# Altium PCB layout.PcbDoc
Units mil, origin at the board's own origin, x right, y up, seen from the top; angles counter-clockwise.
Board outline 3909.97 x 2529.06 mil, 2 copper layers (Top Layer, Bottom Layer); 35 components, 47 nets, 127 pads, 45 vias.
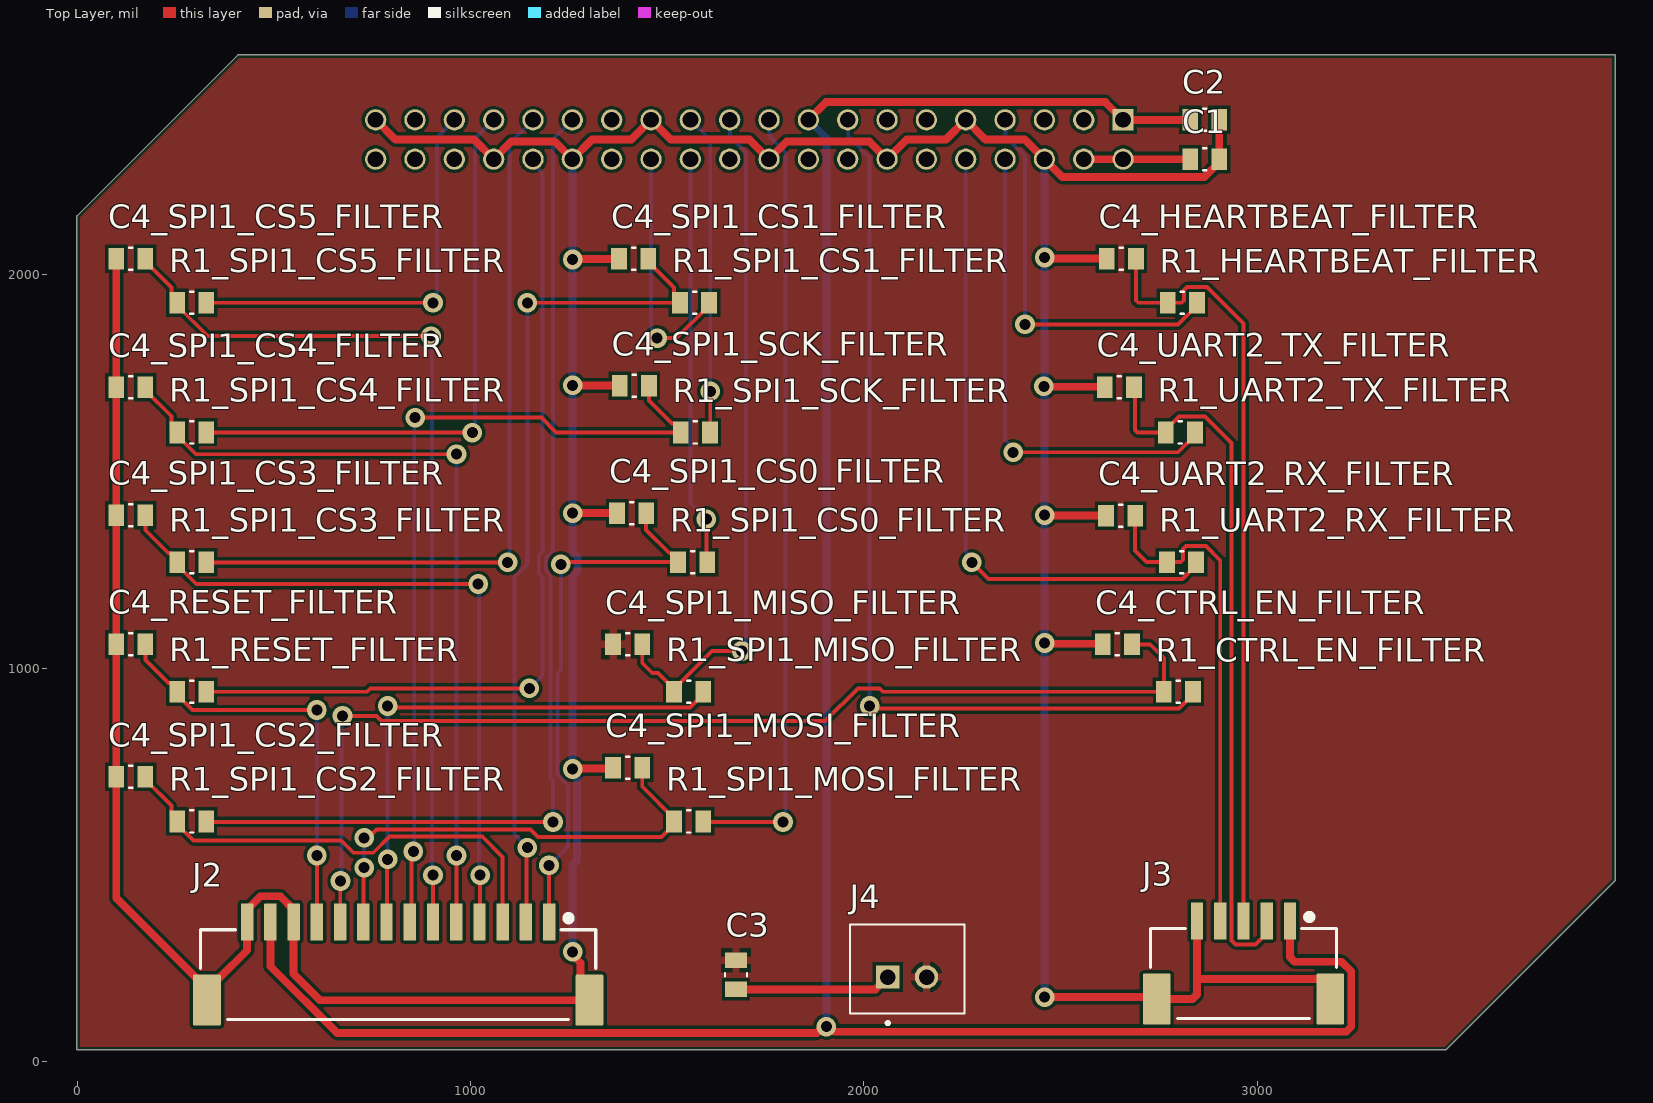
[diagram p0: Top Layer view]
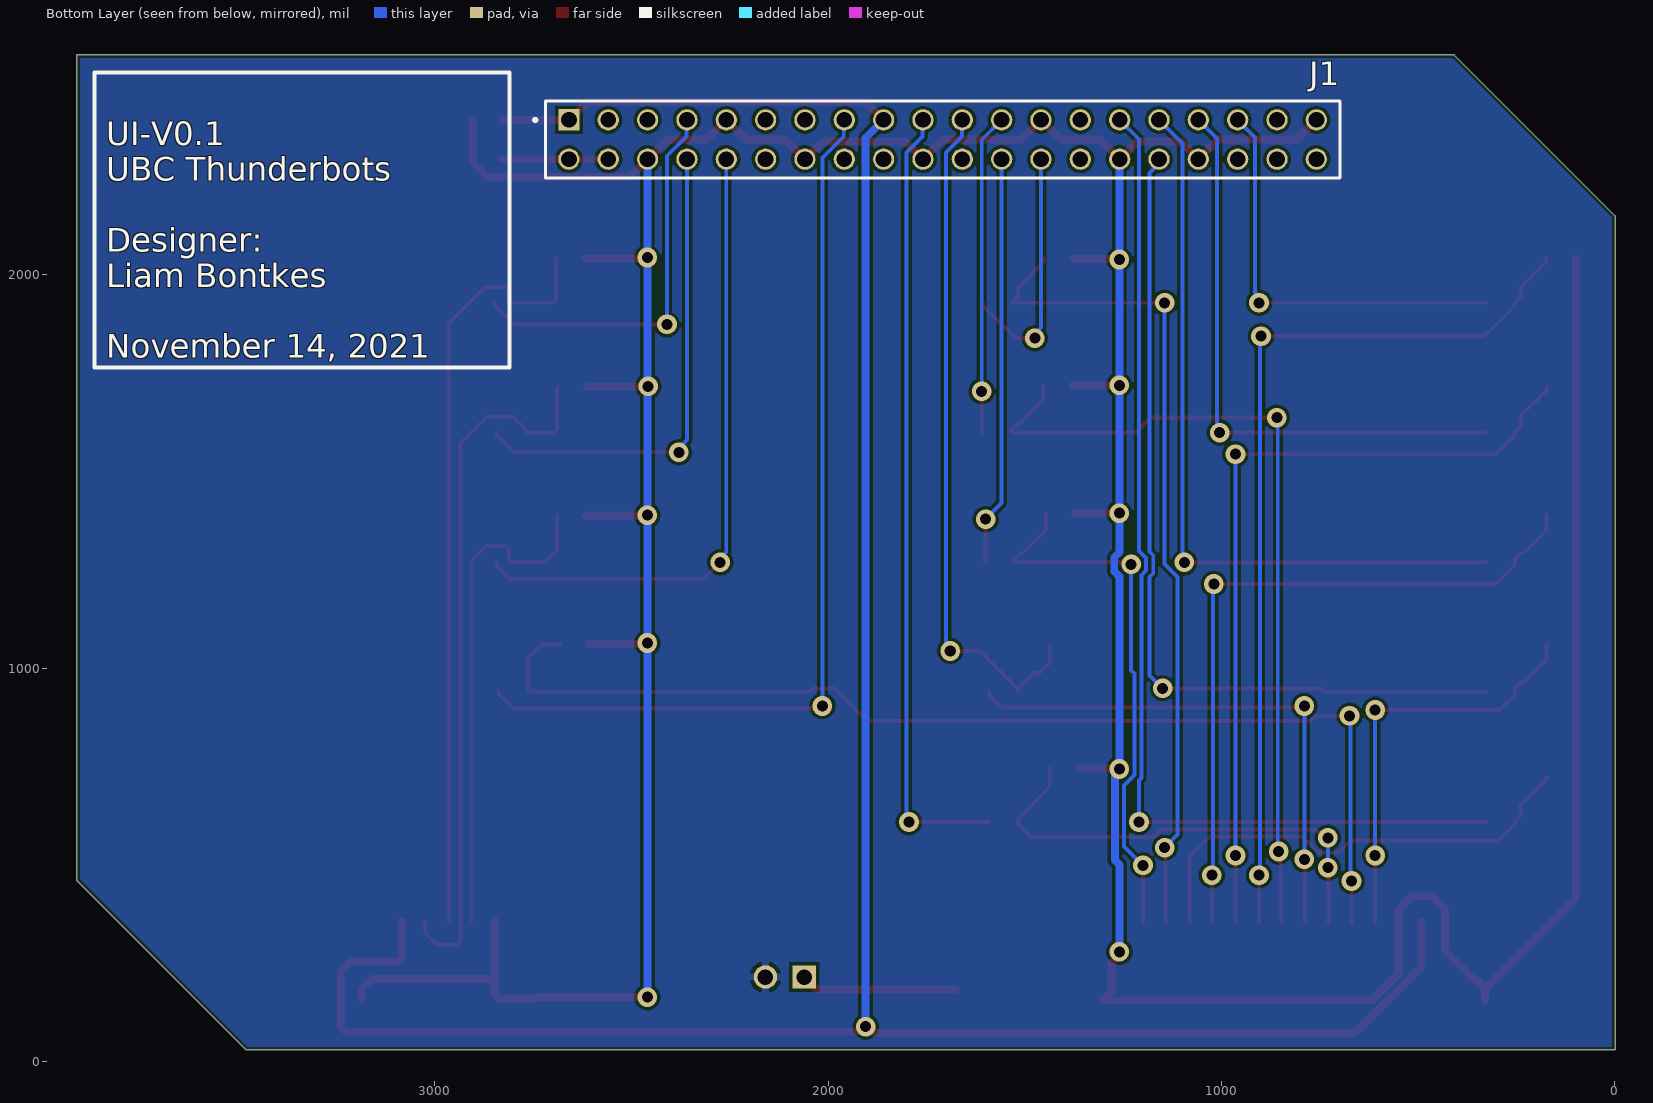
[diagram p1: Bottom Layer view, seen from below]

## Layer stack, top to bottom
Top Solder: solder mask 0.4, Solder Resist, Dk 3.5
Top Layer: signal copper 1.4
Dielectric 1: dielectric 12.6, FR-4, Dk 4.8
Bottom Layer: signal copper 1.4
Bottom Solder: solder mask 0.4, Solder Resist, Dk 3.5

## Board outline
-0.28,30 3480,30 3909.68,459.68 3909.68,2559.06 409.05,2559.06 -0.28,2149.72

## Design rules (kind name [scope] priority, off if disabled: settings)
BoardOutlineClearance [All] p1: gap=7.87 ignorepadtopadclearanceinfootprint=FALSE except(15.75: Arc-SplitBarrior Arc-SplitContinuation Track-SplitBarrior Track-SplitContinuation SMDPad-SplitBarrior SMDPad-SplitContinuation THPad-SplitBarrior THPad-SplitContinuation Via-SplitBarrior Via-SplitContinuation Fill-SplitBarrior Fill-SplitContinuation Poly-SplitBarrior Poly-SplitContinuation Region-SplitBarrior Region-SplitContinuation Text-SplitBarrior Text-SplitContinuation)
Clearance "Clearance Bottom Layer" [OnLayer('Bottom Layer')] p1: gap=8 ignorepadtopadclearanceinfootprint=TRUE except(10: Arc-Text Track-Text SMDPad-Text THPad-Text Via-Text Fill-Text Poly-Text Region-Text Text-Text)
Clearance "Clearance Top Layer" [OnLayer('Top Layer')] p2: gap=8 ignorepadtopadclearanceinfootprint=TRUE except(10: Arc-Text Track-Text SMDPad-Text THPad-Text Via-Text Fill-Text Poly-Text Region-Text Text-Text)
Clearance [All] p3: gap=7.87 ignorepadtopadclearanceinfootprint=TRUE except(3.5: Arc-Arc Arc-Track Arc-SMDPad Track-Track Track-SMDPad SMDPad-SMDPad; 5: Arc-Via Track-Via SMDPad-Via THPad-Via Via-Via; 10: Arc-Text Track-Text SMDPad-Text THPad-Text Via-Text Fill-Text Poly-Text Region-Text Text-Text)
HoleSize [All] p1: absolutevalues=TRUE maxlimit=248.03 minlimit=7.87 maxpercent=80.000 minpercent=20.000
MinimumAnnularRing [All] p1: minimumring=3
MinimumSolderMaskSliver [All] p1: minsoldermaskwidth=3.94
PolygonConnect PolygonConnect_1 [All] p1: thpad.connectstyle=Relief thpad.reliefconductorwidth=20 thpad.reliefentries=4 thpad.polygonreliefangle="90 Angle" thpad.airgapwidth=10 smdpad.connectstyle=Relief smdpad.reliefconductorwidth=20 smdpad.reliefentries=4 smdpad.polygonreliefangle="90 Angle" smdpad.airgapwidth=10 via.connectstyle=Direct via.reliefconductorwidth=20 via.reliefentries=4 via.polygonreliefangle="90 Angle" via.airgapwidth=10
RoomDefinition UART2_TX_FILTER [InComponentClass('UART2_TX_FILTER')] p1: confinementstyle=ConfineIn formatcopy=TRUE lockcomponents=FALSE outline 2569.68,1549.06 2884.68,1549.06 2884.68,1764.06 2569.68,1764.06
RoomDefinition UART2_RX_FILTER [InComponentClass('UART2_RX_FILTER')] p2: confinementstyle=ConfineIn formatcopy=TRUE lockcomponents=FALSE outline 2574.68,1219.06 2889.68,1219.06 2889.68,1439.06 2574.68,1439.06
RoomDefinition U_power [InComponentClass('U_power')] p3: confinementstyle=ConfineIn formatcopy=TRUE lockcomponents=FALSE outline 1624.68,69.06 3244.68,69.06 3244.68,429.06 1624.68,429.06
RoomDefinition U_motordriver [InComponentClass('U_motordriver')] p4: confinementstyle=ConfineIn formatcopy=TRUE lockcomponents=FALSE outline 272.76,69.41 272.76,424.06 1359.68,424.06 1359.68,69.41
RoomDefinition U_jetson-nano [InComponentClass('U_jetson-nano')] p5: confinementstyle=ConfineIn formatcopy=TRUE lockcomponents=FALSE outline 674.68,2224.06 2944.68,2224.06 2944.68,2464.06 674.68,2464.06
RoomDefinition SPI1_SCK_FILTER [InComponentClass('SPI1_SCK_FILTER')] p6: confinementstyle=ConfineIn formatcopy=TRUE lockcomponents=FALSE outline 1339.68,1549.06 1649.68,1549.06 1649.68,1769.06 1339.68,1769.06
RoomDefinition SPI1_MOSI_FILTER [InComponentClass('SPI1_MOSI_FILTER')] p7: confinementstyle=ConfineIn formatcopy=TRUE lockcomponents=FALSE outline 1319.68,564.06 1634.68,564.06 1634.68,799.06 1319.68,799.06
RoomDefinition SPI1_MISO_FILTER [InComponentClass('SPI1_MISO_FILTER')] p8: confinementstyle=ConfineIn formatcopy=TRUE lockcomponents=FALSE outline 1319.68,894.06 1634.68,894.06 1634.68,1109.06 1319.68,1109.06
RoomDefinition SPI1_CS5_FILTER [InComponentClass('SPI1_CS5_FILTER')] p9: confinementstyle=ConfineIn formatcopy=TRUE lockcomponents=FALSE outline 59.68,1879.06 369.68,1879.06 369.68,2089.06 59.68,2089.06
RoomDefinition SPI1_CS4_FILTER [InComponentClass('SPI1_CS4_FILTER')] p10: confinementstyle=ConfineIn formatcopy=TRUE lockcomponents=FALSE outline 59.68,1549.06 369.68,1549.06 369.68,1764.06 59.68,1764.06
RoomDefinition SPI1_CS3_FILTER [InComponentClass('SPI1_CS3_FILTER')] p11: confinementstyle=ConfineIn formatcopy=TRUE lockcomponents=FALSE outline 59.68,1219.06 369.68,1219.06 369.68,1439.06 59.68,1439.06
RoomDefinition SPI1_CS2_FILTER [InComponentClass('SPI1_CS2_FILTER')] p12: confinementstyle=ConfineIn formatcopy=TRUE lockcomponents=FALSE outline 59.68,564.06 369.68,564.06 369.68,774.06 59.68,774.06
RoomDefinition SPI1_CS1_FILTER [InComponentClass('SPI1_CS1_FILTER')] p13: confinementstyle=ConfineIn formatcopy=TRUE lockcomponents=FALSE outline 1334.68,1879.06 1649.68,1879.06 1649.68,2089.06 1334.68,2089.06
RoomDefinition SPI1_CS0_FILTER [InComponentClass('SPI1_CS0_FILTER')] p14: confinementstyle=ConfineIn formatcopy=TRUE lockcomponents=FALSE outline 1329.68,1219.06 1644.68,1219.06 1644.68,1444.06 1329.68,1444.06
RoomDefinition RESET_FILTER [InComponentClass('RESET_FILTER')] p15: confinementstyle=ConfineIn formatcopy=TRUE lockcomponents=FALSE outline 59.68,894.06 369.68,894.06 369.68,1109.06 59.68,1109.06
RoomDefinition HEARTBEAT_FILTER [InComponentClass('HEARTBEAT_FILTER')] p16: confinementstyle=ConfineIn formatcopy=TRUE lockcomponents=FALSE outline 2574.68,1879.06 2889.68,1879.06 2889.68,2089.06 2574.68,2089.06
RoomDefinition CTRL_EN_FILTER [InComponentClass('CTRL_EN_FILTER')] p17: confinementstyle=ConfineIn formatcopy=TRUE lockcomponents=FALSE outline 2564.68,894.06 2879.68,894.06 2879.68,1109.06 2564.68,1109.06
RoutingCorners [All] p1: cornerstyle=Round minsetback=100 maxsetback=100
RoutingVias [All] p1: holewidth=19.68 width=39.37 viastyle="Through Hole" minholewidth=7.87 minwidth=17.72 maxholewidth=39.37 maxwidth=78.74
SilkToSilkClearance [All] p1: silktosilkclearance=3.94
SilkToSolderMaskClearance [IsPad] p1: minsilkscreentomaskgap=3.94 clearancetoexposedcopper=TRUE
SolderMaskExpansion [All] p1: expansion=4 istentingtop=FALSE
Width [All] p1: maxlimit=100 minlimit=3.5 preferedwidth=15
25 further rules are at their usual default settings.

## Classes and differential pairs
channel class low-pass-filter: CTRL_EN_FILTER HEARTBEAT_FILTER RESET_FILTER SPI1_CS0_FILTER SPI1_CS1_FILTER SPI1_CS2_FILTER SPI1_CS3_FILTER SPI1_CS4_FILTER SPI1_CS5_FILTER SPI1_MISO_FILTER SPI1_MOSI_FILTER SPI1_SCK_FILTER UART2_RX_FILTER UART2_TX_FILTER
component class U_power: C3 J3 J4
component class U_motordriver: J2
component class SPI1_MISO_FILTER: C4_SPI1_MISO_FILTER R1_SPI1_MISO_FILTER
component class HEARTBEAT_FILTER: C4_HEARTBEAT_FILTER R1_HEARTBEAT_FILTER
component class UART2_RX_FILTER: C4_UART2_RX_FILTER R1_UART2_RX_FILTER
component class UART2_TX_FILTER: C4_UART2_TX_FILTER R1_UART2_TX_FILTER
component class RESET_FILTER: C4_RESET_FILTER R1_RESET_FILTER
component class CTRL_EN_FILTER: C4_CTRL_EN_FILTER R1_CTRL_EN_FILTER
component class SPI1_CS5_FILTER: C4_SPI1_CS5_FILTER R1_SPI1_CS5_FILTER
component class SPI1_CS4_FILTER: C4_SPI1_CS4_FILTER R1_SPI1_CS4_FILTER
component class SPI1_CS3_FILTER: C4_SPI1_CS3_FILTER R1_SPI1_CS3_FILTER
component class SPI1_CS2_FILTER: C4_SPI1_CS2_FILTER R1_SPI1_CS2_FILTER
component class SPI1_CS1_FILTER: C4_SPI1_CS1_FILTER R1_SPI1_CS1_FILTER
component class SPI1_CS0_FILTER: C4_SPI1_CS0_FILTER R1_SPI1_CS0_FILTER
component class SPI1_MOSI_FILTER: C4_SPI1_MOSI_FILTER R1_SPI1_MOSI_FILTER
component class SPI1_SCK_FILTER: C4_SPI1_SCK_FILTER R1_SPI1_SCK_FILTER
component class U_jetson-nano: C1 C2 J1

## Components (designator, comment, footprint, x,y, rotation, side; value= is the part's Value field where it differs from the comment)
C1 "0.1uF 25V" 0805 2866.68,2294.06 r180 top value=0.1uF
C2 "0.1uF 25V" 0805 2866.68,2394.06 r180 top value=0.1uF
C3 "0.1uF 25V" 0805 1675.15,220.77 r270 top value=0.1uF
C4_CTRL_EN_FILTER "100pF 16V" 0805 2644.68,1060.59 r0 top value=100pF (schematic designator C4)
C4_HEARTBEAT_FILTER "100pF 16V" 0805 2654.68,2041.36 r0 top value=100pF (schematic designator C4)
C4_RESET_FILTER "100pF 16V" 0805 136.68,1060.59 r0 top value=100pF (schematic designator C4)
C4_SPI1_CS0_FILTER "100pF 16V" 0805 1409.68,1394.19 r0 top value=100pF (schematic designator C4)
C4_SPI1_CS1_FILTER "100pF 16V" 0805 1414.68,2041.36 r0 top value=100pF (schematic designator C4)
C4_SPI1_CS2_FILTER "100pF 16V" 0805 136.68,724.06 r0 top value=100pF (schematic designator C4)
C4_SPI1_CS3_FILTER "100pF 16V" 0805 136.68,1389.06 r0 top value=100pF (schematic designator C4)
C4_SPI1_CS4_FILTER "100pF 16V" 0805 136.68,1714.06 r0 top value=100pF (schematic designator C4)
C4_SPI1_CS5_FILTER "100pF 16V" 0805 136.68,2041.36 r0 top value=100pF (schematic designator C4)
C4_SPI1_MISO_FILTER "100pF 16V" 0805 1399.68,1060.59 r0 top value=100pF (schematic designator C4)
C4_SPI1_MOSI_FILTER "100pF 16V" 0805 1399.68,747.02 r0 top value=100pF (schematic designator C4)
C4_SPI1_SCK_FILTER "100pF 16V" 0805 1416.68,1717.78 r0 top value=100pF (schematic designator C4)
C4_UART2_RX_FILTER "100pF 16V" 0805 2652.68,1387.52 r0 top value=100pF (schematic designator C4)
C4_UART2_TX_FILTER "100pF 16V" 0805 2649.68,1714.44 r0 top value=100pF (schematic designator C4)
J1 "CN HDR 40POS" "CN HDR 40POS 0.1 TH" 1709.05,2344.06 r0 bottom
J2 "CN HDR 14POS" "CN HDR 14POS SMD 1.5MM" 816.22,246.73 r0 top
J3 "CN HDR 5POS" "CN HDR 5POS SMD 1.5MM" 2965.15,249.6 r0 top
J4 "CN HDR 2POS JST XH" JST_B2B-XH-A(LF)(SN) 2110.15,235.76 r0 top
R1_CTRL_EN_FILTER "160" 0805 2799.68,940.21 r0 top value=1 (schematic designator R1)
R1_HEARTBEAT_FILTER "160" 0805 2809.68,1929.06 r0 top value=1 (schematic designator R1)
R1_RESET_FILTER "160" 0805 291.68,940.21 r0 top value=1 (schematic designator R1)
R1_SPI1_CS0_FILTER "160" 0805 1564.68,1269.82 r0 top value=1 (schematic designator R1)
R1_SPI1_CS1_FILTER "160" 0805 1569.68,1929.06 r0 top value=1 (schematic designator R1)
R1_SPI1_CS2_FILTER "160" 0805 291.68,610.59 r0 top value=1 (schematic designator R1)
R1_SPI1_CS3_FILTER "160" 0805 291.68,1269.82 r0 top value=1 (schematic designator R1)
R1_SPI1_CS4_FILTER "160" 0805 291.68,1599.44 r0 top value=1 (schematic designator R1)
R1_SPI1_CS5_FILTER "160" 0805 291.68,1929.06 r0 top value=1 (schematic designator R1)
R1_SPI1_MISO_FILTER "160" 0805 1554.68,940.21 r0 top value=1 (schematic designator R1)
R1_SPI1_MOSI_FILTER "160" 0805 1554.68,610.59 r0 top value=1 (schematic designator R1)
R1_SPI1_SCK_FILTER "160" 0805 1571.68,1599.44 r0 top value=1 (schematic designator R1)
R1_UART2_RX_FILTER "160" 0805 2807.68,1269.82 r0 top value=1 (schematic designator R1)
R1_UART2_TX_FILTER "160" 0805 2804.68,1599.44 r0 top value=1 (schematic designator R1)

## Footprints (in the part's own frame and the unit in brackets; to place one, negate y for a bottom-side part, rotate by r counter-clockwise, add the part's x,y. Pads: shape width x height; smd on the part's side, far side on the other; paste and mask are expansions set on the pad)
0805 [mil]
  rect 40x55 smd: 1(-37,0) 2(37,0)
  silkscreen extent -4,-28 4,28, body extent -47,-28 47,28, height 24
"CN HDR 5POS SMD 1.5MM" [mm] "Connector Header Surface Mount 5 position 0.059\" (1.50mm)"
  rrect10% 1.8x3.3 smd: 0(-5.6,-2.3) 0(5.6,-2.3)
  rrect10% 0.8x2.4 smd: 1(3,2.75) 2(1.5,2.75) 3(0,2.75) 4(-1.5,2.75) 5(-3,2.75)
  silkscreen extent -6,-3.55 6,3, body extent -6,-2.9 6,4.1, height 7.51
"CN HDR 14POS SMD 1.5MM" [mm] "Connector Header Surface Mount 14 position 0.059\" (1.50mm)"
  rrect10% 1.8x3.3 smd: 0(-12.35,-2.3) 0(12.35,-2.3)
  rrect10% 0.8x2.4 smd: 1(9.75,2.75) 2(8.25,2.75) 3(6.75,2.75) 4(5.25,2.75) 5(3.75,2.75) 6(2.25,2.75) 7(0.75,2.75) 8(-0.75,2.75) 9(-2.25,2.75) 10(-3.75,2.75) 11(-5.25,2.75) 12(-6.75,2.75) 13(-8.25,2.75) 14(-9.75,2.75)
  silkscreen extent -12.75,-3.55 12.76,3
"CN HDR 40POS 0.1 TH" [mm] "40 Position Header Connector 0.100\" (2.54mm) Through Hole"
  rect 1.37x1.37 hole 1.02: 01(24.13,-1.27)
  round 1.37 hole 1.02: 02(24.13,1.27) 03(21.59,-1.27) 04(21.59,1.27) 05(19.05,-1.27) 06(19.05,1.27) 07(16.51,-1.27) 08(16.51,1.27) 09(13.97,-1.27) 10(13.97,1.27) 11(11.43,-1.27) 12(11.43,1.27) 13(8.89,-1.27) 14(8.89,1.27) 15(6.35,-1.27) 16(6.35,1.27) 17(3.81,-1.27) 18(3.81,1.27) 19(1.27,-1.27) 20(1.27,1.27) 21(-1.27,-1.27) 22(-1.27,1.27) 23(-3.81,-1.27) 24(-3.81,1.27) 25(-6.35,-1.27) 26(-6.35,1.27) 27(-8.89,-1.27) 28(-8.89,1.27) 29(-11.43,-1.27) 30(-11.43,1.27) 31(-13.97,-1.27) 32(-13.97,1.27) 33(-16.51,-1.27) 34(-16.51,1.27) 35(-19.05,-1.27) 36(-19.05,1.27) 37(-21.59,-1.27) 38(-21.59,1.27) 39(-24.13,-1.27) 40(-24.13,1.27)
  silkscreen extent -25.66,-2.47 26.4,2.47
JST_B2B-XH-A(LF)(SN) [mm]
  rect 1.508x1.508 hole 1: 1(-1.25,-0.525)
  round 1.508 hole 1: 2(1.25,-0.525)
  silkscreen extent -3.7,-3.6 3.7,2.88, body extent -3.7,-2.85 3.7,2.9, height 7.1

## Part data
C1 C2 C3: library part "CAP 0.1uF 25V", "Default Symbol for Capacitors", Operating Temperature="-55°C ~ 125°C", Rating=25V, Temperature Coefficient=X7R, Tolerance=10%, Part Number="CAP 0.1uF 25V"
C4_CTRL_EN_FILTER C4_HEARTBEAT_FILTER C4_RESET_FILTER C4_SPI1_CS0_FILTER C4_SPI1_CS1_FILTER C4_SPI1_CS2_FILTER C4_SPI1_CS3_FILTER C4_SPI1_CS4_FILTER C4_SPI1_CS5_FILTER C4_SPI1_MISO_FILTER C4_SPI1_MOSI_FILTER C4_SPI1_SCK_FILTER C4_UART2_RX_FILTER C4_UART2_TX_FILTER: library part "CAP 100pF 16V", "Default Symbol for Capacitors", Operating Temperature="-55°C ~ 125°C", Rating=16V, Temperature Coefficient=X5R, Tolerance=10%, Part Number="CAP 100pF 16V"
J1: "40 Position Header Connector", Supplier Part Number 1=S6104-ND, Part Number="CN HDR 40POS", Pin Count=40, Supplier 1=Digi-Key, Supplier URL 1=https://www.digikey.ca/en/products/detail/sullins-connector-solutions/PPTC202LFBN-RC/807240?s=N4IgTCBcDaIMoDYCMAGALAWgHIBEQF0BfIA
J2: "Connector Header 14 Position", Supplier Part Number 1=455-4210-1-ND, Part Number="CN HDR 14POS", Pin Count=14, Supplier 1=Digi-Key, Supplier URL 1=https://www.digikey.ca/en/products/detail/jst-sales-america-inc/BM14B-ZESS-TBT-LF-SN/1886998?s=N4IgTCBcDaICwFYEFo5gIwAZnuQOQBEQBdAXyA
J3: "Connector Header 5 Position", Supplier Part Number 1=455-2383-1-ND, Part Number="CN HDR 5POS", Pin Count=5, Supplier 1=Digi-Key, Supplier URL 1=https://www.digikey.ca/en/products/detail/jst-sales-america-inc/BM05B-ZESS-TBT-LF-SN/1886989?s=N4IgTCBcDaICwFYEFowGYAcbkEZkDkAREAXQF8g
J4: "Connector Header Through Hole 2 position 0.098 _2.50mm_ / JST XH", Package=None, MF="JST Sales", MP=B2B-XH-A_LF__SN_, Part Number="CN HDR 2POS JST XH", Pin Count=2, Price=None, SnapEDA_Link=https://www.snapeda.com/parts/B2B-XH-A%28LF%29%28SN%29/JST%20Sales%20America%20Inc./view-part/492310/?ref=snap
R1_CTRL_EN_FILTER R1_HEARTBEAT_FILTER R1_RESET_FILTER R1_SPI1_CS0_FILTER R1_SPI1_CS1_FILTER R1_SPI1_CS2_FILTER R1_SPI1_CS3_FILTER R1_SPI1_CS4_FILTER R1_SPI1_CS5_FILTER R1_SPI1_MISO_FILTER R1_SPI1_MOSI_FILTER R1_SPI1_SCK_FILTER R1_UART2_RX_FILTER R1_UART2_TX_FILTER: library part "RES 160.0 1/8W", "Default Resistor Symbol", Package=0805, Power (Watts)=0.125W, Tolerance=5%, Part Number="RES 160.0 1/8W"

## Via types
v1: diameter 50, hole 28, Top Layer to Bottom Layer, 45 vias

## Nets (pads, with @x,y where several pads share a name; then routed paths per layer and width w, separated by ;. In a path a pad name is that pad's centre, name@x,y a point inside that pad or via, vN(x,y) a via of type N, cw(c..) or ccw(c..) an arc to the next point about the centre after c; other vN are vias at no path point)
CTRL_EN: J1.15 R1_CTRL_EN_FILTER.2 | length 2359.7
  Top Layer w10: v1(2014.68,904.06) 2021.03,897.71 2801.68,897.71 2836.68,932.71 R1_CTRL_EN_FILTER.2
  Bottom Layer w10: J1.15 1960.37,2392.73 1960.37,2352.09 2014.68,2297.77 v1(2014.68,904.06)
CTRL_EN_FILTER: C4_CTRL_EN_FILTER.2 J2.10 R1_CTRL_EN_FILTER.1 | length 2839.2
  Top Layer w10: J2.10 669.13,355.55 669.13,458.5 v1(669.68,459.06) ; v1(674.68,879.06) 760.94,879.06 773.94,866.06 1901.68,866.06 1984.68,949.06 2039.68,949.06 2048.53,940.21 R1_CTRL_EN_FILTER.1 2762.68,1026.06 2728.15,1060.59 C4_CTRL_EN_FILTER.2
  Bottom Layer w10: v1(669.68,459.06) 672.18,461.56 672.18,876.56 v1(674.68,879.06)
HEARTBEAT: J1.07 R1_HEARTBEAT_FILTER.2 | length 1005.2
  Top Layer w10: v1(2409.68,1874.06) 2799.18,1874.06 2846.68,1921.56 R1_HEARTBEAT_FILTER.2
  Bottom Layer w10: J1.07 2360.37,2392.73 2360.37,2352.09 2409.68,2302.77 v1(2409.68,1874.06)
HEARTBEAT_FILTER: C4_HEARTBEAT_FILTER.2 J3.3 R1_HEARTBEAT_FILTER.1 | length 1972
  Top Layer w10: C4_HEARTBEAT_FILTER.2 2691.68,1934.91 2697.54,1929.06 2807.68,1929.06 2813.68,1935.06 2813.68,1961.94 2821.3,1969.56 2872.07,1969.56 2965.16,1876.47 J3.3
I2C_1_SCL: J1.28
I2C_1_SDA: J1.27
I2C_2_SCL: J1.05
I2C_2_SDA: J1.03
I2S_4_SCLK: J1.12
I2S_4_SDIN: J1.38
I2S_4_SDOUT: J1.40
JETSON_3V3: C2.2 J1.01 J1.17 J2.13 J3.1 | length 6682.7
  Top Layer w20: J2.13 491.42,242.72 660.92,73.22 1880.73,73.22 1896.57,89.06 v1(1904.68,89.06) 1912.8,89.06 1925.76,76.09 3226.44,76.09 3239.06,88.71 3239.06,229.4 3214.4,254.06 3094.98,254.06 3083.27,265.77 J3.1 ; J1.17 1904.02,2439.02 2614.08,2439.02 J1.01 C2.2
  Bottom Layer w20: J1.17 1904.68,2348.42 v1(1904.68,89.06)
JETSON_5V: C1.2 J1.02 J1.04 | length 270.6
  Top Layer w20: J1.04 J1.02 C1.2
JETSON_GND: C1.1 C2.1 C4_CTRL_EN_FILTER.1 C4_HEARTBEAT_FILTER.1 C4_RESET_FILTER.1 C4_SPI1_CS0_FILTER.1 C4_SPI1_CS1_FILTER.1 C4_SPI1_CS2_FILTER.1 C4_SPI1_CS3_FILTER.1 C4_SPI1_CS4_FILTER.1 C4_SPI1_CS5_FILTER.1 C4_SPI1_MOSI_FILTER.1 C4_SPI1_SCK_FILTER.1 C4_UART2_RX_FILTER.1 C4_UART2_TX_FILTER.1 J1.06 J1.09 J1.14 J1.20 J1.25 J1.30 J1.34 J1.39 J2.0 J2.12 J2.14 J3.0 J3.5 | length 12224.4
  Top Layer w20: C4_SPI1_CS5_FILTER.1 C4_SPI1_CS4_FILTER.1 C4_SPI1_CS3_FILTER.1 C4_RESET_FILTER.1 C4_SPI1_CS2_FILTER.1 99.68,416.02 J2.0@330,185.71 ; J2.0@330,156.18 J2.0@330,185.71 ; J1.39 809.05,2344.05 1009.05,2344.05 J1.34 1104.02,2339.02 1214.08,2339.02 J1.30 1309.05,2344.06 1409.05,2344.06 J1.25 1509.05,2344.05 1709.05,2344.05 J1.20 1804.02,2339.02 2014.08,2339.02 J1.14 2109.05,2344.06 2209.05,2344.06 J1.09 2309.05,2344.05 2409.05,2344.05 J1.06 2504.55,2248.56 2865.68,2248.56 2903.68,2286.56 C1.1 C2.1 ; v1(1259.68,279.06) 1259.68,270.94 1279.48,251.14 1279.48,179.14 1302.44,156.18 617.56,156.18 550.47,223.27 J2.12 550.47,386.5 516.72,420.24 466.11,420.24 432.36,386.5 432.36,283.48 360.02,211.14 355.43,211.14 J2.0@330,185.71 ; v1(1259.68,744.06) 1261.17,745.54 1361.2,745.54 C4_SPI1_MOSI_FILTER.1 ; v1(1259.68,1394.06) 1259.82,1394.19 C4_SPI1_CS0_FILTER.1 ; v1(1259.68,1719.06) 1260.32,1718.42 1379.05,1718.42 C4_SPI1_SCK_FILTER.1 ; v1(1259.68,2039.06) 1260.84,2040.21 1376.53,2040.21 C4_SPI1_CS1_FILTER.1 ; v1(2457.7,1716.64) 2458.8,1715.54 2611.58,1715.54 C4_UART2_TX_FILTER.1 ; v1(2459.68,164.06) 2739.68,164.06 2744.68,159.06 2835.33,159.06 2847.05,170.77 2847.05,210.47 ; v1(2459.68,1064.06) 2461.42,1062.32 2605.95,1062.32 C4_CTRL_EN_FILTER.1 ; v1(2459.68,1389.06) 2460.45,1388.29 2614.92,1388.29 C4_UART2_RX_FILTER.1 ; v1(2459.68,2044.06) 2462.38,2041.36 C4_HEARTBEAT_FILTER.1 ; J3.5 2847.05,210.47 ; J3.0@3185.63,159.06 3185.63,185.04 3160.2,210.47 2847.05,210.47
  Bottom Layer w20: J1.30 1259.37,2293.74 1259.37,2039.06 1259.37,1719.06 1259.37,1394.06 1259.37,1295.19 1272.68,1281.87 1272.68,1246.24 1259.37,1232.93 1259.37,736.26 1270.68,724.94 1270.68,511.56 1259.68,500.56 v1(1259.68,279.06) ; J1.06 2459.05,164.69 v1(2459.68,164.06)
NetJ2_8: J2.8 R1_SPI1_MISO_FILTER.2 | length 1375.3
  Top Layer w10: J2.8 788.19,356.5 788.19,512.56 v1(789.68,514.06) ; v1(789.68,904.06) 794.03,899.71 1558.68,899.71 1591.68,932.71 R1_SPI1_MISO_FILTER.2
  Bottom Layer w10: v1(789.68,514.06) v1(789.68,904.06)
POWER_5V: C3.2 J4.1 | length 398.8
  Top Layer w20: C3.2 2029.62,183.77 J4.1
POWER_GND: C3.1 C4_SPI1_MISO_FILTER.1 J4.2
RESET: J1.32 R1_RESET_FILTER.2 | length 2200.6
  Top Layer w10: R1_RESET_FILTER.2 736.52,940.21 745.37,949.06 v1(1149.68,949.06)
  Bottom Layer w10: v1(1149.68,949.06) 1182.68,982.06 1182.68,1231.86 1173.68,1240.86 1173.68,1287.25 1182.68,1296.25 1182.68,2258.53 1159.05,2282.17 J1.32
RESET_FILTER: C4_RESET_FILTER.2 J2.11 R1_RESET_FILTER.1 | length 1076
  Top Layer w10: C4_RESET_FILTER.2 173.68,1021.21 232.18,962.71 239.68,962.71 254.68,947.71 R1_RESET_FILTER.1 254.68,932.71 293.34,894.06 v1(609.68,894.06) ; J2.11 609.61,355.08 609.61,523.98 v1(609.68,524.06)
  Bottom Layer w10: v1(609.68,524.06) v1(609.68,894.06)
SPI_1_CS0: J1.24 R1_SPI1_CS0_FILTER.2 | length 1041.9
  Top Layer w10: v1(1599.68,1379.06) 1599.68,1271.82 R1_SPI1_CS0_FILTER.2
  Bottom Layer w10: J1.24 1559.05,1419.69 v1(1599.68,1379.06)
SPI_1_CS0_FILTER: C4_SPI1_CS0_FILTER.2 J2.1 R1_SPI1_CS0_FILTER.1 | length 1405.4
  Top Layer w10: v1(1199.68,499.06) 1199.88,498.86 1199.88,355.2 J2.1 ; v1(1229.68,1264.06) 1235.45,1269.82 R1_SPI1_CS0_FILTER.1 1527.68,1277.32 1512.68,1292.32 1506.05,1292.32 1446.68,1351.69 C4_SPI1_CS0_FILTER.2
  Bottom Layer w10: v1(1199.68,499.06) 1247.68,547.06 1247.68,702.32 1221.68,728.32 1221.68,986.77 1229.68,994.77 v1(1229.68,1264.06)
SPI_1_CS1: J1.26 R1_SPI1_CS1_FILTER.2 | length 635.2
  Top Layer w10: v1(1474.68,1839.06) 1524.18,1839.06 1606.68,1921.56 R1_SPI1_CS1_FILTER.2
  Bottom Layer w10: J1.26 1459.05,1865.52 1474.68,1849.88 v1(1474.68,1839.06)
SPI_1_CS1_FILTER: C4_SPI1_CS1_FILTER.2 J2.2 R1_SPI1_CS1_FILTER.1 | length 2136.8
  Top Layer w10: J2.2 1142.85,356.83 1142.85,542.22 v1(1144.68,544.06) ; v1(1144.68,1929.06) R1_SPI1_CS1_FILTER.1 1517.68,1944.06 1517.68,1967.86 1451.68,2033.86 C4_SPI1_CS1_FILTER.2
  Bottom Layer w10: v1(1144.68,544.06) 1111.68,577.06 1111.68,1232.32 1144.68,1265.32 v1(1144.68,1929.06)
SPI_1_CS2: J1.29 R1_SPI1_CS2_FILTER.2 | length 2702
  Top Layer w10: R1_SPI1_CS2_FILTER.2 330.22,609.06 v1(1209.68,609.06)
  Bottom Layer w10: v1(1209.68,609.06) 1209.68,714.86 1203.68,720.86 1203.68,1236.32 1191.68,1248.32 1191.68,1279.8 1209.68,1297.8 1209.68,2344.69 J1.29
SPI_1_CS2_FILTER: C4_SPI1_CS2_FILTER.2 J2.3 R1_SPI1_CS2_FILTER.1 | length 1215.3
  Top Layer w10: C4_SPI1_CS2_FILTER.2 173.68,716.56 239.68,650.56 239.68,625.59 R1_SPI1_CS2_FILTER.1 254.68,603.09 295.72,562.06 671.69,562.06 702.69,531.06 752.94,531.06 793.94,572.06 1030.11,572.06 1081.97,520.2 J2.3
SPI_1_CS3: J1.31 R1_SPI1_CS3_FILTER.2 | length 1918
  Top Layer w10: R1_SPI1_CS3_FILTER.2 329.45,1269.06 v1(1094.68,1269.06)
  Bottom Layer w10: v1(1094.68,1269.06) 1099.02,1273.39 1099.02,2334.02 J1.31
SPI_1_CS3_FILTER: C4_SPI1_CS3_FILTER.2 J2.4 R1_SPI1_CS3_FILTER.1 | length 1811.5
  Top Layer w10: C4_SPI1_CS3_FILTER.2 173.68,1350.82 232.18,1292.32 239.68,1292.32 254.68,1277.32 R1_SPI1_CS3_FILTER.1 254.68,1262.32 302.95,1214.06 v1(1019.68,1214.06) ; J2.4 1023.8,355.89 1023.8,473.17 v1(1024.68,474.06)
  Bottom Layer w10: v1(1019.68,1214.06) 1022.18,1211.56 1022.18,476.56 v1(1024.68,474.06)
SPI_1_CS4: J1.33 R1_SPI1_CS4_FILTER.2 | length 1493.7
  Top Layer w10: R1_SPI1_CS4_FILTER.2 329.07,1599.06 v1(1004.68,1599.06)
  Bottom Layer w10: v1(1004.68,1599.06) 1011.49,1605.86 1011.49,2346.5 J1.33
SPI_1_CS4_FILTER: C4_SPI1_CS4_FILTER.2 J2.5 R1_SPI1_CS4_FILTER.1 | length 2074.9
  Top Layer w10: C4_SPI1_CS4_FILTER.2 173.68,1706.56 239.68,1640.56 239.68,1614.44 R1_SPI1_CS4_FILTER.1 254.68,1591.94 302.57,1544.06 v1(964.68,1544.06) ; J2.5 964.27,355.41 964.27,523.64 v1(964.68,524.06)
  Bottom Layer w10: v1(964.68,524.06) v1(964.68,1544.06)
SPI_1_CS5: J1.35 R1_SPI1_CS5_FILTER.2 | length 1063.5
  Top Layer w10: R1_SPI1_CS5_FILTER.2 v1(904.68,1929.06)
  Bottom Layer w10: v1(904.68,1929.06) 912.34,1936.71 912.34,1952.57 914.68,1954.91 914.68,2349.69 J1.35
SPI_1_CS5_FILTER: C4_SPI1_CS5_FILTER.2 J2.6 R1_SPI1_CS5_FILTER.1 | length 2321.6
  Top Layer w10: C4_SPI1_CS5_FILTER.2 173.68,2033.86 239.68,1967.86 239.68,1944.06 R1_SPI1_CS5_FILTER.1 254.68,1921.56 332.18,1844.06 v1(899.68,1844.06) ; v1(904.68,474.06) 904.74,474 904.74,355.06 J2.6
  Bottom Layer w10: v1(899.68,1844.06) 902.18,1841.56 902.18,476.56 v1(904.68,474.06)
SPI_1_MISO: C4_SPI1_MISO_FILTER.2 J1.21 R1_SPI1_MISO_FILTER.1 | length 1727.4
  Top Layer w10: C4_SPI1_MISO_FILTER.2 1436.68,1013.66 1462.16,988.19 1477.21,988.19 R1_SPI1_MISO_FILTER.1@1517.68,947.71 ; v1(1689.68,1044.06) 1614.03,1044.06 R1_SPI1_MISO_FILTER.1@1517.68,947.71 ; R1_SPI1_MISO_FILTER.1@1517.68,947.71 R1_SPI1_MISO_FILTER.1 R1_SPI1_MISO_FILTER.1@1517.68,947.71
  Bottom Layer w10: J1.21 1660.37,2392.73 1660.37,2352.09 1701.02,2311.44 v1@1701.02,1066.21
SPI_1_MOSI: J1.19 R1_SPI1_MOSI_FILTER.2 | length 2008.6
  Top Layer w10: R1_SPI1_MOSI_FILTER.2 1593.22,609.06 v1(1794.68,609.06)
  Bottom Layer w10: J1.19 1760.37,2392.73 1760.37,2352.09 1801.02,2311.44 1801.02,615.39 v1(1794.68,609.06)
SPI_1_MOSI_FILTER: C4_SPI1_MOSI_FILTER.2 J2.9 R1_SPI1_MOSI_FILTER.1 | length 1210.2
  Top Layer w10: J2.9 728.66,356.02 728.66,492.03 v1(729.68,493.06) ; v1(729.68,569.06) 740.51,569.06 761.51,590.06 1152.43,590.06 1171.43,571.06 1485.65,571.06 1517.68,603.09 1517.68,618.09 1436.68,699.09 C4_SPI1_MOSI_FILTER.2
  Bottom Layer w10: v1(729.68,493.06) v1(729.68,569.06)
SPI_1_SCK: J1.23 R1_SPI1_SCK_FILTER.2 | length 816
  Top Layer w10: R1_SPI1_SCK_FILTER.2 1609.68,1600.44 v1(1609.68,1704.06)
  Bottom Layer w10: J1.23 1609.68,2343.42 v1(1609.68,1704.06)
SPI_1_SCK_FILTER: C4_SPI1_SCK_FILTER.2 J2.7 R1_SPI1_SCK_FILTER.1 | length 2134.7
  Top Layer w10: J2.7 850.22,359.47 850.22,529.59 v1(854.68,534.06) ; v1(859.68,1637.06) 1180.12,1637.06 1217.73,1599.44 R1_SPI1_SCK_FILTER.1 1534.68,1606.94 1519.68,1621.94 1512.18,1621.94 1453.68,1680.44 C4_SPI1_SCK_FILTER.2
  Bottom Layer w10: v1(854.68,534.06) 857.18,536.56 857.18,1634.56 v1(859.68,1637.06)
SPI_2_CS0: J1.18
SPI_2_CS1: J1.16
SPI_2_MISO: J1.22
SPI_2_MOSI: J1.37
SPI_2_SCK: J1.13
UART_2_CTS: J1.36
UART_2_RTS: J1.11
UART_2_RX: J1.10 R1_UART2_RX_FILTER.2 | length 1640.8
  Top Layer w10: v1(2274.68,1269.06) 2316.42,1227.32 2809.68,1227.32 2844.68,1262.32 R1_UART2_RX_FILTER.2
  Bottom Layer w10: J1.10 2259.05,1295.52 2274.68,1279.88 v1(2274.68,1269.06)
UART_2_RX_FILTER: C4_UART2_RX_FILTER.2 J3.4 R1_UART2_RX_FILTER.1 | length 1280.9
  Top Layer w10: C4_UART2_RX_FILTER.2 2689.68,1299.06 2718.92,1269.82 2805.68,1269.82 2811.68,1275.82 2811.68,1302.71 2819.3,1310.32 2870.07,1310.32 2906.1,1274.29 J3.4
UART_2_TX: J1.08 R1_UART2_TX_FILTER.2 | length 1240.8
  Top Layer w10: v1(2379.68,1549.06) 2798.8,1549.06 2841.68,1591.94 R1_UART2_TX_FILTER.2
  Bottom Layer w10: J1.08 2359.05,1580.52 2379.68,1559.88 v1(2379.68,1549.06)
UART_2_TX_FILTER: C4_UART2_TX_FILTER.2 J3.2 R1_UART2_TX_FILTER.1 | length 1808.8
  Top Layer w10: C4_UART2_TX_FILTER.2 2689.33,1711.8 2689.33,1605.3 2695.18,1599.44 R1_UART2_TX_FILTER.1 2767.68,1606.94 2800.68,1639.94 2867.07,1639.94 2934.85,1572.16 2934.85,307.73 2944.95,297.63 2995.46,297.63 3024.21,326.38 J3.2

## Polygon pours and split planes (outlines as drawn)
POWER_GND on Top Layer "POWER_GND_L01_P000" (solid, pour order 0): 0,2150 409.06,2559.06 3910,2560 3910,460 3480,30 0,0
POWER_GND on Bottom Layer "POWER_GND_L02_P001" (solid, pour order 1): 0,2150 409.06,2559.06 3910,2560 3910,460 3480,30 0,0

## Silkscreen, mask and mechanical layers (free items; w line width, h text height)
Bottom Overlay:
  lines w10: 2809.68,1764.06 3864.68,1764.06 3864.68,2514.06 2809.68,2514.06 2809.68,1764.06
  text "UI-V0.1 / UBC Thunderbots /  / Designer: / Liam Bontkes /  / November 14, 2021" at 3834.68,1789.06 h60
Mechanical 1:
  the board outline again, w10